# Altium PCB Kicker.PcbDoc (part 2 of 2)
Units mm, origin at the board's own origin, x right, y up, seen from the top; angles counter-clockwise.
Board outline 84.4 x 34.2 mm, 2 copper layers (Top Layer, Bottom Layer), stack 0.781 mm thick; 40 components, 30 nets, 114 pads, 21 vias.
Unrouted connection lines stored in the file: 11.
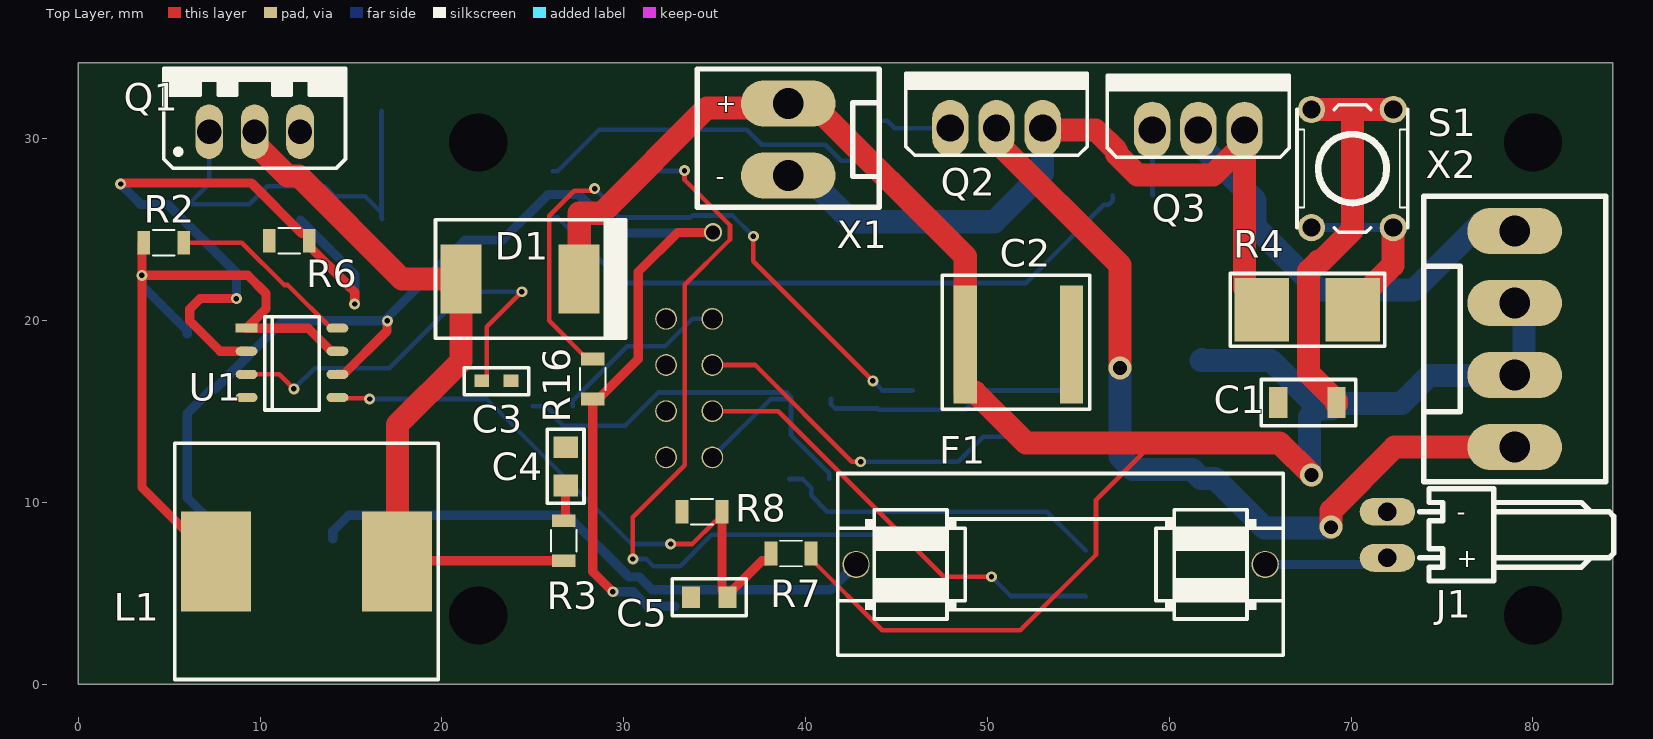
[diagram p0: Top Layer view]

## Part data (continued)
R8 R11 R12 R16: "PANASONIC ELECTRONIC COMPONENTS - ERJ6ENF1201V - RES, THICK FILM, 1K2, 125MW, 1%, REEL", Case Code (Imperial)=0805, Case Code (Metric)=2012, Manufacturer=Panasonic, Manufacturer Part Number=ERJ-6ENF1201V, Max Operating Temperature=155°C, Max Power Dissipation=125mW, Min Operating Temperature=-55°C, Package Quantity=1, Resistance=1.2kR, Temperature Coefficient=100ppm/°C, Tolerance=1%, Voltage Rating=150V, Case/Package=0805, Category="Chip SMD Resistors", ComponentLink1Description=https://datasheet.ciiva.com/11821/0900766b80f80784-11821543.pdf?src-supplier=RSComponents, ComponentLink1URL=https://datasheet.ciiva.com/11821/0900766b80f80784-11821543.pdf?src-supplier=RSComponents, ComponentLink2Description=https://datasheet.ciiva.com/7802/426256-7802438.pdf?src-supplier=Element14, ComponentLink2URL=https://datasheet.ciiva.com/7802/426256-7802438.pdf?src-supplier=Element14, ComponentLink3Description=https://datasheet.ciiva.com/16775/70260748-16775350.pdf?src-supplier=Allied+Electronics, ComponentLink3URL=https://datasheet.ciiva.com/16775/70260748-16775350.pdf?src-supplier=Allied+Electronics, ComponentLink4Description=https://datasheet.ciiva.com/9198/aoa0000ce2-9198663.pdf?src-supplier=Avnet, ComponentLink4URL=https://datasheet.ciiva.com/9198/aoa0000ce2-9198663.pdf?src-supplier=Avnet, ComponentLink5Description=https://datasheet.ciiva.com/22687/1678782-22687448.pdf?src-supplier=Element14, ComponentLink5URL=https://datasheet.ciiva.com/22687/1678782-22687448.pdf?src-supplier=Element14, ComponentLink6Description=https://datasheet.ciiva.com/46372/1678782-46372712.pdf?src-supplier=Element14, ComponentLink6URL=https://datasheet.ciiva.com/46372/1678782-46372712.pdf?src-supplier=Element14, ComponentLink7Description=https://datasheet.ciiva.com/46372/1678782-46372713.pdf?src-supplier=Element14, ComponentLink7URL=https://datasheet.ciiva.com/46372/1678782-46372713.pdf?src-supplier=Element14, ComponentLink8Description=https://datasheet.ciiva.com/22667/1678782-22667898.pdf?src-supplier=Element14, ComponentLink8URL=https://datasheet.ciiva.com/22667/1678782-22667898.pdf?src-supplier=Element14, ComponentLink9Description=https://datasheet.ciiva.com/17215/aoa0000ce2-17215019.pdf?src-supplier=Avnet+Europe, ComponentLink9URL=https://datasheet.ciiva.com/17215/aoa0000ce2-17215019.pdf?src-supplier=Avnet+Europe, ComponentLink10Description=https://datasheet.ciiva.com/6138/426256-6138188.pdf?src-supplier=Farnell, ComponentLink10URL=https://datasheet.ciiva.com/6138/426256-6138188.pdf?src-supplier=Farnell, ComponentLink11Description=https://datasheet.ciiva.com/24069/aoa0000ce2-24069708.pdf?src-supplier=Mouser, ComponentLink11URL=https://datasheet.ciiva.com/24069/aoa0000ce2-24069708.pdf?src-supplier=Mouser, ComponentLink12Description=https://datasheet.ciiva.com/30129/aoa0000ce2-30129052.pdf?src-supplier=Onlinecomponents.com, ComponentLink12URL=https://datasheet.ciiva.com/30129/aoa0000ce2-30129052.pdf?src-supplier=Onlinecomponents.com, ComponentLink13Description=https://datasheet.ciiva.com/16773/70260748-16773646.pdf?src-supplier=Allied+Electronics, ComponentLink13URL=https://datasheet.ciiva.com/16773/70260748-16773646.pdf?src-supplier=Allied+Electronics, Composition="Thick Film", Contact Plating=Tin, Depth=1.25mm, Features="Automotive AEC-Q200", Height=0.6mm, Lead Free="Lead Free", Length=2mm, Military Standard=Not, Mount="Surface Mount", Number of Terminations=2, Packaging="Tape and Reel", Power Rating=125mW, Pricing 1="1=0,10000, 10=0,07200, 100=0,02750, 1000=0,01210, 2500=0,01045 (USD)", Radiation Hardening=No, REACH SVHC="No SVHC", RoHS=Yes, Stock 1=22603, Supplier 1=Digi-Key, Termination=SMD/SMT, Voltage Rating (DC)=150V, Width=0.049inch
R9 R15: library part Res_390R_0805, "RES SMD 0805 390R 5% 1/8W", Supplier Part Number 1=311-390ARDKR-ND, Tolerance=1%, Supplier 1=Digi-Key
S1: "Switch Tactile N.O. SPST Flat Plunger PC Pins 0.05A 24VDC 2.55N Thru-Hole Bag", Contact Current Rating=50mA, Contact Resistance=100mR, Manufacturer=Omron, Max Operating Temperature=70°C, Max Voltage Rating (DC)=24V, Min Operating Temperature=-25°C, Operating Force=2.55N, Package Quantity=1500, Actuator Length=0.9mm, Actuator Type=Standard, Category="Switch Accessories", ComponentLink1Description=https://datasheet.ciiva.com/1532/611570-1532565.pdf?src-supplier=Element14, ComponentLink1URL=https://datasheet.ciiva.com/1532/611570-1532565.pdf?src-supplier=Element14, ComponentLink2Description=https://datasheet.ciiva.com/48509/b3f-48509461.pdf?src-supplier=Distrelec, ComponentLink2URL=https://datasheet.ciiva.com/48509/b3f-48509461.pdf?src-supplier=Distrelec, ComponentLink3Description=https://datasheet.ciiva.com/2899/b3f-0811-2899831.pdf?src-supplier=Digi-Key, ComponentLink3URL=https://datasheet.ciiva.com/2899/b3f-0811-2899831.pdf?src-supplier=Digi-Key, ComponentLink4Description=https://datasheet.ciiva.com/7986/en-b3f-7986906.pdf?src-supplier=Element14, ComponentLink4URL=https://datasheet.ciiva.com/7986/en-b3f-7986906.pdf?src-supplier=Element14, ComponentLink5Description=https://datasheet.ciiva.com/16154/en-b3f-16154890.pdf?src-supplier=Onlinecomponents.com, ComponentLink5URL=https://datasheet.ciiva.com/16154/en-b3f-16154890.pdf?src-supplier=Onlinecomponents.com, Contact Material=Gold,Silver, Contact Plating=Silver,Gold, Current Rating=50mA, Depth=6mm, Electrical Life=300000Cycles, Height=4.3mm, Illumination Type=Non-Illuminated,Illuminated, Lead Free="Lead Free", Length=6mm, Manufacturer Part Number=B3F-1005, Max Current Rating=50mA, Mechanical Life=100000Cycles, Mount="Through Hole", Number of Poles=1, Orientation=Straight, Packaging=Bag, Pricing 1="1=0,33000, 10=0,31400, 25=0,29800, 100=0,26990, 250=0,24608, 500=0,22872, 1000=0,19512, 2500=0,18970, 5000=0,17886 (USD)", REACH SVHC=Unknown, RoHS=Yes, Stock 1=3042, Supplier 1=Digi-Key, Switch Function=Off-Mom, Switch Travel=0.25mm, Termination="PC Pins", Throw Configuration=SPST, Voltage Rating (DC)=24V, Weight=0.25g, Width=6mm
SV1: "Conn Unshrouded Header HDR 8 POS 2.54mm Solder ST Thru-Hole Tray", Contact Resistance=20mR, Current Rating=3A, Housing Color=Black, Insulation Resistance=5GR, Manufacturer=Molex, Max Operating Temperature=125°C, Min Operating Temperature=-55°C, Package Quantity=2400, Voltage Rating=350V, Category=Connectors, ComponentLink1Description=https://datasheet.ciiva.com/30231/0901310764-pcb-headers-30231232.pdf?src-supplier=Onlinecomponents.com, ComponentLink1URL=https://datasheet.ciiva.com/30231/0901310764-pcb-headers-30231232.pdf?src-supplier=Onlinecomponents.com, ComponentLink2Description=https://datasheet.ciiva.com/11748/0900766b81280103-11748626.pdf?src-supplier=RSComponents, ComponentLink2URL=https://datasheet.ciiva.com/11748/0900766b81280103-11748626.pdf?src-supplier=RSComponents, ComponentLink3Description=https://datasheet.ciiva.com/5158/0901310764-pcb-headers-151525-5158722.pdf?src-supplier=Mouser, ComponentLink3URL=https://datasheet.ciiva.com/5158/0901310764-pcb-headers-151525-5158722.pdf?src-supplier=Mouser, Contact Material=Brass, Contact Plating=Gold, Gender=Male, Housing Material=Polyester, Lead Free="Lead Free", Lead Pitch=2.54mm, Manufacturer Part Number=90131-0764, Mount="Through Hole", Number of Contacts=8, Number of Poles=8, Number of Positions=8, Number of Rows=2, Orientation=Straight, Packaging=Tray, Pitch=2.54mm, Pricing 1="1=2,24000, 10=2,03400, 100=1,74300, 500=1,45250, 1000=1,24500, 5000=1,10390, 10000=1,07900 (USD)", Radiation Hardening=No, REACH SVHC=Unknown, RoHS=Yes, Stock 1=1061, Supplier 1=Digi-Key, Termination=Solder, Voltage Rating (AC)=350V, Working Voltage=350V
T1: "TRANS PNP 40V 0.2A SOT23-3", Case/Package=SOT-23, Collector Base Voltage (VCBO)=40V, Collector Emitter Saturation Voltage=-400mV, Continuous Collector Current=-200mA, Emitter Base Voltage (VEBO)=6V, Frequency=250MHz, Manufacturer="Diodes Zetex", Max Collector Current=200mA, Max Operating Temperature=150°C, Max Power Dissipation=300mW, Min Operating Temperature=-55°C, Package Quantity=3000, Voltage Rating (DC)=-40V, Category=BJTs, Collector Emitter Breakdown Voltage=40V, Collector Emitter Voltage (VCEO)=40V, ComponentLink1Description=https://datasheet.ciiva.com/27052/1540746-27052408.pdf?src-supplier=Jameco, ComponentLink1URL=https://datasheet.ciiva.com/27052/1540746-27052408.pdf?src-supplier=Jameco, ComponentLink2Description=https://datasheet.ciiva.com/15139/getdatasheetpartid-255292-15139821.pdf?src-supplier=Verical, ComponentLink2URL=https://datasheet.ciiva.com/15139/getdatasheetpartid-255292-15139821.pdf?src-supplier=Verical, Contact Plating=Tin,Matte, Current Rating=-200mA, Element Configuration=Single, Gain Bandwidth Product=250MHz, Height=1mm, hFE Min=100, Lead Free="Lead Free", Length=3.05mm, Manufacturer Part Number=MMBT3906-7-F, Max Breakdown Voltage=40V, Max Frequency=250MHz, Mount="Surface Mount", Number of Elements=1, Number of Pins=3, Packaging="Tape and Reel", Polarity=PNP, Power Dissipation=300mW, Pricing 1="1=0,12000, 10=0,10600, 25=0,10120, 100=0,04440, 250=0,04268, 500=0,03490, 1000=0,02424 (USD)", Radiation Hardening=No, REACH SVHC="No SVHC", RoHS=Yes, Stock 1=42541, Supplier 1=Digi-Key, Transition Frequency=250MHz, Weight=0.000282oz, Width=1.4mm
U1: "Conv DC-DC Step Down/Step Up 3V to 40V 8-Pin SO N T/R", Case/Package=SO, Manufacturer=STMicroelectronics, Max Input Voltage=40V, Max Operating Temperature=125°C, Max Output Current=1.5A, Max Output Voltage=38V, Min Input Voltage=3V, Min Operating Temperature=-40°C, Min Output Voltage=1.25V, Package Quantity=1, Switching Frequency=100kHz, Category="Voltage Regulators - Switching", ComponentLink1Description=https://datasheet.ciiva.com/4878/cd00001232-4878840.pdf?src-supplier=Mouser, ComponentLink1URL=https://datasheet.ciiva.com/4878/cd00001232-4878840.pdf?src-supplier=Mouser, ComponentLink2Description=https://datasheet.ciiva.com/2029/cd00001232-2029723.pdf?src-supplier=Digi-Key, ComponentLink2URL=https://datasheet.ciiva.com/2029/cd00001232-2029723.pdf?src-supplier=Digi-Key, ComponentLink3Description=https://datasheet.ciiva.com/17297/cd00001232-17297035.pdf?src-supplier=Avnet+Europe, ComponentLink3URL=https://datasheet.ciiva.com/17297/cd00001232-17297035.pdf?src-supplier=Avnet+Europe, ComponentLink4Description=https://datasheet.ciiva.com/2029/cd00001232-2029724.pdf?src-supplier=Digi-Key, ComponentLink4URL=https://datasheet.ciiva.com/2029/cd00001232-2029724.pdf?src-supplier=Digi-Key, ComponentLink5Description=https://datasheet.ciiva.com/16209/cd00001232-16209900.pdf?src-supplier=Future+Electronics, ComponentLink5URL=https://datasheet.ciiva.com/16209/cd00001232-16209900.pdf?src-supplier=Future+Electronics, ComponentLink6Description=https://datasheet.ciiva.com/2029/cd00001232-2029725.pdf?src-supplier=Digi-Key, ComponentLink6URL=https://datasheet.ciiva.com/2029/cd00001232-2029725.pdf?src-supplier=Digi-Key, Contact Plating=Gold, Efficiency=89%, Height=1.65mm, Lead Free="Lead Free", Length=5mm, Manufacturer Part Number=MC34063EBD-TR, Mount="Surface Mount", Number of Outputs=1, Number of Pins=8, Output Current=1.5A, Output Type=Adjustable,Fixed, Output Voltage=38V, Packaging="Tape and Reel", Pricing 1="1=0,66000, 10=0,56100, 25=0,52360, 100=0,38900, 250=0,32912, 500=0,31416, 1000=0,23188 (USD)", Radiation Hardening=No, REACH SVHC="No SVHC", RoHS=Yes, Stock 1=77713, Supplier 1=Digi-Key, Synchronous Rectifier=No, Width=4mm
X1: library part "CONN HEADER R_A 2POS 3.96MM", "Conn Wire to Board HDR 2 POS 3.96mm Solder RA Thru-Hole KK® Bag", Color=Natural, Contact Resistance=10mR, Housing Color=White, Manufacturer 1=Molex, Manufacturer Part Number 1=26-60-5020, Max Operating Temperature=75°C, Min Operating Temperature=0°C, Supplier Part Number 1=WM4640-ND, ComponentLink1Description=https://datasheet.ciiva.com/711/026605020-sd-711883.pdf?src-supplier=Digi-Key, ComponentLink1URL=https://datasheet.ciiva.com/711/026605020-sd-711883.pdf?src-supplier=Digi-Key, ComponentLink2Description=https://datasheet.ciiva.com/22827/0900766b80d6bf1d-22827278.pdf?src-supplier=RSComponents, ComponentLink2URL=https://datasheet.ciiva.com/22827/0900766b80d6bf1d-22827278.pdf?src-supplier=RSComponents, ComponentLink3Description=https://datasheet.ciiva.com/30179/80070026605020-pcb-headers-30179412.pdf?src-supplier=Onlinecomponents.com, ComponentLink3URL=https://datasheet.ciiva.com/30179/80070026605020-pcb-headers-30179412.pdf?src-supplier=Onlinecomponents.com, ComponentLink4Description=https://datasheet.ciiva.com/15217/getdatasheetpartid-299439-15217821.pdf?src-supplier=Verical, ComponentLink4URL=https://datasheet.ciiva.com/15217/getdatasheetpartid-299439-15217821.pdf?src-supplier=Verical, Connector Type="Male Pin", Contact Material=Bronze,Brass, Contact Mating Length=0.45inch, Contact Plating=Tin,Copper, Depth=23.14mm, Fastening Type=Friction, Gender=Male, Housing Material=Polyester, Length=7.77mm, Mount="Through Hole", Number of Contacts=2, Number of Positions=2, Number of Rows=1, Orientation="Right Angle", Packaging=Bulk, Pitch=3.96mm, Pricing 1="1=0,32000, 10=0,30300, 100=0,21240, 500=0,18202, 1000=0,15169, 5000=0,13002, 10000=0,12135 (USD)", RoHS=Yes, Stock 1=7578, Supplier 1=Digi-Key, Termination=Solder
X2: library part "CONN HEADER R_A 4POS 3.96MM", "Headers & Wire Housings R/A PCB HDR 4P TIN FRICTION LOCK", Contact Resistance=10mR, Current Rating=7A, Flammability Rating="UL94 V-0", Housing Color=Natural, Insulation Resistance=50GR, Manufacturer 1=Molex, Manufacturer Part Number 1=26-60-5040, Max Operating Temperature=75°C, Min Operating Temperature=0°C, Package Quantity=350, Voltage Rating=250V, ComponentLink1Description=https://datasheet.ciiva.com/19454/880132-19454025.pdf?src-supplier=Jameco, ComponentLink1URL=https://datasheet.ciiva.com/19454/880132-19454025.pdf?src-supplier=Jameco, ComponentLink2Description=https://datasheet.ciiva.com/10029/0026605040-pcb-headers-10029266.pdf?src-supplier=Avnet, ComponentLink2URL=https://datasheet.ciiva.com/10029/0026605040-pcb-headers-10029266.pdf?src-supplier=Avnet, ComponentLink3Description=https://datasheet.ciiva.com/7844/1631036-7844119.pdf?src-supplier=Element14, ComponentLink3URL=https://datasheet.ciiva.com/7844/1631036-7844119.pdf?src-supplier=Element14, ComponentLink4Description=https://datasheet.ciiva.com/5157/0026605040-pcb-headers-159671-5157677.pdf?src-supplier=Mouser, ComponentLink4URL=https://datasheet.ciiva.com/5157/0026605040-pcb-headers-159671-5157677.pdf?src-supplier=Mouser, ComponentLink5Description=https://datasheet.ciiva.com/11749/0900766b80d6bf1d-11749079.pdf?src-supplier=RSComponents, ComponentLink5URL=https://datasheet.ciiva.com/11749/0900766b80d6bf1d-11749079.pdf?src-supplier=RSComponents, ComponentLink6Description=https://datasheet.ciiva.com/30188/171410026605040-pcb-headers-30188011.pdf?src-supplier=Onlinecomponents.com, ComponentLink6URL=https://datasheet.ciiva.com/30188/171410026605040-pcb-headers-30188011.pdf?src-supplier=Onlinecomponents.com, Contact Gender=Male, Contact Material=Brass,Bronze,Tin, Contact Plating=Tin,Copper, Gender=Male, Glow Wire Compliant=Non-compliant, Housing Material=Polyester, Lead Free="Lead Free", Material=Polyester, Mount="Through Hole", Number of Circuits=4, Number of Contacts=4, Number of Lines=1, Number of Poles=4, Number of Positions=4, Number of Rows=1, Orientation="Right Angle", Packaging=Bulk, Pitch=3.96mm, Pricing 1="1=0,37980, 10=0,35730, 100=0,28160, 500=0,24650, 1000=0,20520, 5000=0,18050, 10000=0,16730, 1=0,42000, 10=0,39510, 100=0,31430, 500=0,27630, 1000=0,26400, 1=0,41740, 10=0,38930, 100=0,29830, 500=0,25770, 1000=0,21140, 5000=0,18430, 10000=0,17000 (USD)", Radiation Hardening=No, REACH SVHC=Unknown, RoHS=Yes, Stock 1=13747, Supplier 1=Arrow, Supplier Part Number 1=26-60-5040, Termination=Solder, Voltage Rating (DC)=250V

## Free pads (board coordinates)
  round 2 hole 3.2 unplated: ""(22,3.8) ""(22,29.8) ""(80,3.805) ""(80,29.8)

## Via types
v1: diameter 0.6, hole 0.3, Top Layer to Bottom Layer, tented top, 14 vias
v2: diameter 0.6, hole 0.3, Top Layer to Bottom Layer, 3 vias
v3: diameter 1.27, hole 0.762, Top Layer to Bottom Layer, tented top, 3 vias
v4: diameter 1.016, hole 0.762, Top Layer to Bottom Layer, tented top, 1 vias

## Nets (pads, with @x,y where several pads share a name; then routed paths per layer and width w, separated by ;. In a path a pad name is that pad's centre, name@x,y a point inside that pad or via, vN(x,y) a via of type N, cw(c..) or ccw(c..) an arc to the next point about the centre after c; other vN are vias at no path point)
+3V3: R9.2 R11.2 R15.2 SV1.2 | length 26.6
  Bottom Layer w0.254: R11.2 25.731,15.3 26.202,14.829 26.202,14.694 26.673,14.223 30.071,14.223 31.905,16.057 38.977,16.057 39.2,15.834 R15.2 ; SV1.2 38.08,15.7 R15.2 ; R9.2 41.3,11.6 39.2,13.7 R15.2
GND: C1.2 C2.2 C3.2 C4.2 C5.2 IC1.4 IC2.3 IC4.4 J1.1 Q1.S R5.1 R6.1 R8.1 SV1.3 SV1.5 SV1.7 T1.C U1.4 | length 0.1
  Top Layer w0.508: C5.2 C5.2@33.7,4.9
GNDA: Q2.S Q3.S R4.2 X1.2 | length 41.9
  Top Layer w1.27: Q2.S 53.14,30.5 55.945,30.5 57.102,29.343 57.102,29.172 58.258,28.015 62.402,28.015 Q3.S@64.14,29.753 ; Q3.S Q3.S@64.14,29.753 ; R4.2 65.1,20.85 64.14,21.81 Q3.S@64.14,29.753
  Bottom Layer w1.27: X1.2 40.033,27.989 42.572,25.45 50.375,25.45 53.04,28.115 Q2.S
NetC3_1: C3.1 U1.3 | length 23.5
  Top Layer w0.254: U1.3 11.054,17.055 v1(11.854,16.255) ; C3.1 22.25,16.7 22.473,16.923 22.473,19.673 v1(24.4,21.6)
  Bottom Layer w0.254: v1(11.854,16.255) 12.999,17.4 17.1,17.4 21.3,21.6 v1(24.4,21.6)
NetC4_1: C4.1 R3.1 | length 2.3
  Top Layer w0.508: R3.1 R3.1@26.704,9 ; C4.1 26.8,9.096 R3.1@26.704,9 ; R3.1@27,9 R3.1@26.704,9
NetC5_1: C5.1 R7.2 R8.2 U1.5 | length 33.3
  Top Layer w0.254: U1.5 14.296,15.743 15.982,15.743 v1(16.025,15.7) ; v1(32.575,7.725) 33.775,7.725 35.027,8.977 35.177,8.977 35.4,9.2 R8.2@35.4,9.35
  Top Layer w0.508: R8.2@35.4,9.2 35.4,5.2 C5.1@35.7,4.9 ; C5.1 C5.1@35.7,4.9 ; R7.2 38.1,6.9 38.004,6.804 37.604,6.804 C5.1@35.7,4.9
  Bottom Layer w0.254: v1(16.025,15.7) 22.45,15.7 30.425,7.725 v1(32.575,7.725)
NetD1_2: D1.2 L1.1 Q1.D R3.2 | length 41.2
  Top Layer w0.508: L1.1 17.55,6.8 R3.2
  Top Layer w1.27: Q1.D 9.7,29.731 9.896,29.535 9.927,29.535 11.497,27.965 12.135,27.965 17.8,22.3 D1.2 21.05,17.785 17.55,14.285 L1.1@17.55,6.8
NetD2_1: D2.1 Q1.G R5.2 T1.E | length 22
  Bottom Layer w0.254: Q1.G 7.2,27.543 6.107,26.45 T1.E 9.394,26.4 10.392,27.398 13.556,27.398 14.11,26.845 15.767,26.845 D2.1@16.675,25.937 ; R5.2 D2.1@16.675,25.937 ; D2.1 16.675,25.645 D2.1@16.675,25.937
NetD2_2: D2.2 R6.2 | length 24.4
  Top Layer w0.508: 2.325,27.525 2.375,27.575 9.525,27.575 12.304,24.796 12.604,24.796 12.7,24.7 R6.2 12.7,24.1 14.725,22.075 14.725,22.05 15.2,21.575 v2(15.2,20.925)
  Bottom Layer w0.254: D2.2@12.3,25.308 12.3,25.454 D2.2
  Bottom Layer w0.508: 2.325,27.525 3.076,26.774 ; 3.45,26.4 4.307,26.4 ; D2.2@12.227,25.527 12.3,25.454 15.2,22.554 15.2,21.987 v2(15.2,20.925)
NetD5_2: D5.2 F1.1 | length 31.8
  Bottom Layer w0.508: D5.2 14,8.429 14.871,9.3 26.892,9.3 30.284,5.908 30.849,5.908 31.553,5.204 41.379,5.204 F1.1
NetF1_2: F1.2 J1.2 | length 6.9
  Bottom Layer w0.508: F1.2 70.603,6.6 70.963,6.96 J1.2
NetIC1_1: IC1.1 R9.1 | length 18.2
  Bottom Layer w0.254: R9.1 39.831,11.3 40.302,10.829 40.302,10.398 41.2,9.5 53.27,9.5 IC1.1
NetIC1_2: IC1.2 SV1.4 | length 24.8
  Top Layer w0.254: SV1.4 38.495,15.03 47.6,5.925 v1(50.225,5.925)
  Bottom Layer w0.254: v1(50.225,5.925) 51.285,4.865 55.365,4.865 IC1.2
NetIC1_3: IC1.3 IC2.2 R12.1 | length 43.2
  Top Layer w0.254: v1(30.5,6.9) 30.5,9.208 33.357,12.065 33.357,21.985 35.843,24.471 35.843,25.245 33.34,27.748 v1(33.34,28.26)
  Bottom Layer w0.254: v1(30.5,6.9) 31.235,6.9 31.635,6.5 33.1,6.5 34.825,8.225 45.345,8.225 IC1.3 ; IC2.2 31.72,28.24 33.32,28.24 v1(33.34,28.26)
NetIC2_4: IC2.4 IC4.3 R16.1 | length 35.3
  Top Layer w0.254: R16.1 28,17.9 25.9,20 25.9,25.767 27.283,27.15 28.275,27.15 v1(28.397,27.272) ; v1(37.125,24.65) 37.125,23.275 v1(43.7,16.7)
  Bottom Layer w0.254: v1(28.397,27.272) 29.104,26.565 29.104,26.321 29.745,25.68 IC2.4 33.646,25.68 33.759,25.793 35.982,25.793 v1(37.125,24.65) ; v1(43.7,16.7) 44.23,16.17 IC4.3
NetIC2_5: IC2.5 R14.2 | length 34.5
  Bottom Layer w0.254: IC2.5 26.358,25.68 29.961,22.077 52.102,22.077 54.275,24.25 56.402,26.377 56.677,26.377 56.9,26.6 R14.2
NetIC2_7: IC2.7 R13.1 | length 19.7
  Bottom Layer w0.254: IC2.7 26.358,28.22 28.638,30.5 36.766,30.5 37.58,29.686 41.08,29.686 41.958,28.808 44.192,28.808 R13.1
NetIC4_1: IC4.1 R15.1 | length 14.6
  Bottom Layer w0.254: R15.1 41.4,15.4 41.623,15.177 43.962,15.177 44.021,15.118 48.792,15.118 49.844,16.17 IC4.1
NetIC4_2: IC4.2 SV1.6 | length 23
  Top Layer w0.254: SV1.6 37.23,17.57 42.55,12.25 v1(43.025,12.25)
  Bottom Layer w0.254: v1(43.025,12.25) 48.389,12.25 49.769,13.63 IC4.2
NetL1_2: L1.2 R1.1 R2.2 U1.1 U1.7 | length 38.6
  Top Layer w0.508: R2.2 3.504,24.204 3.504,23.612 3.498,23.606 v1(3.498,22.502) ; L1.2 3.498,10.852 v1(3.498,22.502) ; U1.7 13.912,18.325 12.642,19.595 U1.1 10.325,20.666 10.325,21.5 9.323,22.502 v1(3.498,22.502)
  Bottom Layer w0.508: v1(3.498,22.502) 3.516,22.484 3.516,21.934 6,19.45 R1.1
NetQ2_G: Q2.G R13.2 | length 3.9
  Bottom Layer w0.254: R13.2 44.5,31 44.9,30.6 Q2.G
NetQ3_G: Q3.G R14.1 | length 3.6
  Bottom Layer w0.254: Q3.G 59.08,30.48 59.08,26.92 R14.1
NetR2_1: R2.1 U1.8 | length 10.4
  Top Layer w0.254: R2.1 8.996,24.3 11.325,21.971 11.528,21.971 13.904,19.595 U1.8
NetR4_1: R4.1 S1.3 S1.4 | length 11.2
  Top Layer w1.27: R4.1@70.965,21.465 R4.1 70.1,20.85 72.3,23.05 72.3,25.1 S1.3
  Bottom Layer w0.508: S1.4 S1.3
NetR11_1: R11.1 SV1.8 | length 9.8
  Bottom Layer w0.254: R11.1 27.2,15.6 30.197,18.597 32.269,18.597 33.782,20.11 SV1.8
NetT1_B: T1.B U1.2 | length 14.6
  Top Layer w0.508: v2(8.7,21.225) 6.7,21.225 6.125,20.65 6.125,20 7.8,18.325 U1.2
  Bottom Layer w0.508: T1.B 4.925,26.4 8.7,22.625 v2(8.7,21.225)
VCC: D5.1 IC2.6 R1.2 R12.2 R16.2 U1.6 | length 74.6
  Top Layer w0.508: U1.6 14.596,17.055 16.982,19.441 16.982,19.982 v1(17,20) ; v1(29.4,5.1) 28.3,6.2 R16.2 28.6,15.7 30.8,17.9 30.8,22.69 32.968,24.858 v4(34.908,24.858)
  Bottom Layer w0.508: D5.1 7.5,8.77 6,10.27 R1.2 6,14.9 7.346,16.246 7.521,16.246 11.275,20 v1(17,20) ; v1@16.915,20.085 21.28,24.45 23.342,24.45 25.842,26.95 IC2.6 27.512,26.95 29.628,24.834 34.884,24.834 v4(34.908,24.858) ; v1(29.4,5.1) 30.514,5.1 31.314,4.3 R12.2
X2-1: D3.2 Q2.D X2.1 | length 46.6
  Top Layer w1.27: Q2.D 50.5,29.853 57.3,23.053 v3(57.3,17.4) ; v3(68.9,8.65) 68.9,9.562 72.398,13.06 X2.1
  Bottom Layer w1.27: v3(57.3,17.4) 57.3,12.53 58.015,11.815 61.26,11.815 D3.2 62.52,11.325 65.245,8.6 68.85,8.6 v3(68.9,8.65)
X2-2: C1.1 C2.1 D1.1 D3.1 D4.1 R7.1 S1.1 S1.2 X1.1 X2.2 X2.3 | length 136.3
  Top Layer w0.254: R7.1 40.3,6.9 44.225,2.975 51.8,2.975 55.975,7.15 55.975,10.15 59.1,13.275
  Top Layer w1.27: D1.1 27.55,25.915 28.787,25.915 34.578,31.706 X1.1@38.804,31.706 ; X1.1 40.377,31.949 48.779,23.547 C2.1 48.779,16.085 49.315,16.085 52.125,13.275 59.1,13.275 66.075,13.275 v3(67.825,11.525) ; S1.2 70.075,31.625 ; C1.1@69.2,15.42 C1.1 69.2,15.58 67.665,17.115 67.665,22.737 68.213,23.285 68.368,23.285 70.075,24.992 70.075,31.625 ; S1.1 70.075,31.625
  Bottom Layer w1.27: D3.1@61.8,17.875 D3.1 65.58,17.825 67.944,15.461 72.775,15.461 74.314,17 79.5,17 79.52,17.02 79.52,20.46 X2.3 ; v3(67.825,11.525) 67.715,11.635 67.715,14.71 68.155,15.15 D4.1@68.925,15.15
X2-4: D4.2 Q3.D X2.4 | length 24.3
  Bottom Layer w1.27: Q3.D 61.6,29.753 64.727,26.626 64.727,25.178 68.205,21.7 D4.2 73.47,21.7 77.19,25.42 X2.4@79.386,25.42
pads on no net: IC2.1 IC2.8 SV1.1
copper on no net: | length 0.5
  Bottom Layer w0.508: 3.076,26.774 3.45,26.4
  other v2: 2.325,27.525

## Polygon pours and split planes (outlines as drawn)
GND on Top Layer "GNDTOP" (solid, pour order 7): 83,1
no net on Top Layer "GNDTOP" (solid, pour order 0): 1,1
GND on Bottom Layer "Bottom Ground Plane" (solid, pour order 17): 83.5,33.25 1,33.25 1,1 83.5,1

## Text inside footprints (layer, text, board x,y; h text height)
J1: Top Overlay "-" at 75.81,8.992 h1; Top Overlay "+" at 75.81,6.452 h1
X1: Top Overlay "-" at 35.047,27.469 h1; Top Overlay "+" at 35.047,31.469 h1